# Altium PCB Pedal_XLR.PcbDoc (part 2 of 2)
Units mm, origin at the board's own origin, x right, y up, seen from the top; angles counter-clockwise.
Board outline 129.71 x 40 mm, 4 copper layers (Top Layer, Layer 1, Layer 2, Bottom Layer), stack 1.191 mm thick; 173 components, 126 nets, 550 pads, 107 vias.
Unrouted connection lines stored in the file: 71.
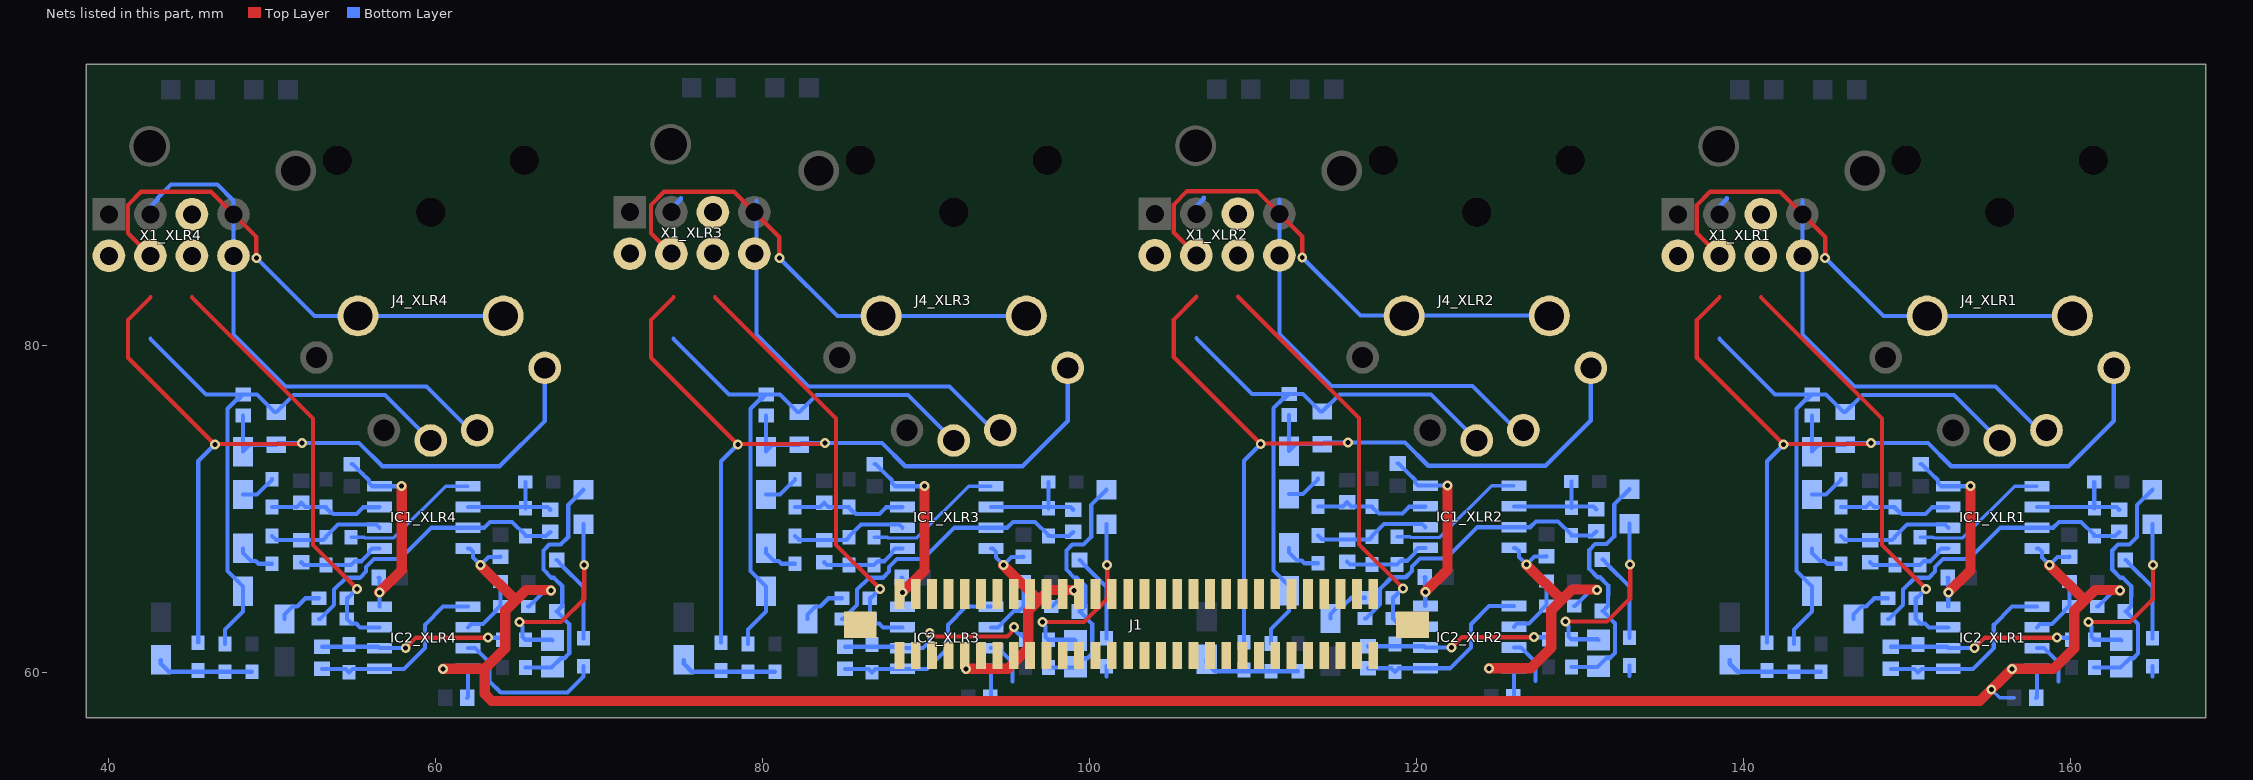
[diagram p2: the nets of this part, all layers, seen from the top]

## Via types
v1: diameter 0.61, hole 0.305, Top Layer to Bottom Layer, 107 vias

## Nets (pads, with @x,y where several pads share a name; then routed paths per layer and width w, separated by ;. In a path a pad name is that pad's centre, name@x,y a point inside that pad or via, vN(x,y) a via of type N, cw(c..) or ccw(c..) an arc to the next point about the centre after c; other vN are vias at no path point) (continued)
NetC1_XLR1_1: C1_XLR1.1 R2_XLR1.1 | length 2.2
  Bottom Layer w0.254: C1_XLR1.1@144.215,70.866 144.222,70.873 145.062,70.873 145.67,71.481 145.72,71.481 145.993,71.754 R2_XLR1.1@145.993,71.804
NetC1_XLR2_1: C1_XLR2.1 R2_XLR2.1 | length 2.2
  Bottom Layer w0.254: C1_XLR2.1@112.215,70.898 112.222,70.905 113.062,70.905 113.67,71.513 113.72,71.513 113.993,71.786 R2_XLR2.1@113.993,71.836
NetC1_XLR3_1: C1_XLR3.1 R2_XLR3.1 | length 2.2
  Bottom Layer w0.254: C1_XLR3.1@80.215,70.866 80.222,70.873 81.062,70.873 81.67,71.481 81.72,71.481 81.993,71.754 R2_XLR3.1@81.993,71.804
NetC1_XLR4_1: C1_XLR4.1 R2_XLR4.1 | length 2.2
  Bottom Layer w0.254: C1_XLR4.1@48.215,70.866 48.222,70.873 49.062,70.873 49.67,71.481 49.72,71.481 49.993,71.754 R2_XLR4.1@49.993,71.804
NetC3_XLR1_1: C3_XLR1.1 IC1_XLR1.7 R3_XLR1.1 R5_XLR1.2 | length 17.8
  Bottom Layer w0.254: R3_XLR1.1@148.865,63.246 148.915,63.246 149.785,64.116 149.785,65.053 150.5,65.768 151.356,65.768 151.737,66.149 151.737,66.423 152.223,66.909 153.819,66.909 155.744,68.834 158.974,68.834 159.326,69.186 160.677,69.186 161.487,68.376 R5_XLR1.2@161.487,68.326 162.757,68.326 C3_XLR1.1@163.011,68.58
NetC3_XLR1_2: C3_XLR1.2 IC1_XLR1.6 R5_XLR1.1 R9_XLR1.2 | length 6.7
  Bottom Layer w0.254: IC1_XLR1.6@157.976,70.104 R5_XLR1.1@161.487,70.104 ; R5_XLR1.1@161.487,70.026 R5_XLR1.1@161.487,70.104 ; R9_XLR1.2@161.487,71.628 R5_XLR1.1@161.487,70.104 ; C3_XLR1.2@163.011,69.93 162.837,70.104 R5_XLR1.1@161.487,70.104
NetC3_XLR2_1: C3_XLR2.1 IC1_XLR2.7 R3_XLR2.1 R5_XLR2.2 | length 17.8
  Bottom Layer w0.254: R3_XLR2.1@116.865,63.278 116.915,63.278 117.785,64.148 117.785,65.085 118.5,65.8 119.356,65.8 119.737,66.181 119.737,66.455 120.223,66.941 121.819,66.941 123.744,68.866 126.974,68.866 127.326,69.218 128.677,69.218 129.487,68.408 R5_XLR2.2@129.487,68.358 130.757,68.358 C3_XLR2.1@131.011,68.612
NetC3_XLR2_2: C3_XLR2.2 IC1_XLR2.6 R5_XLR2.1 R9_XLR2.2 | length 6.7
  Bottom Layer w0.254: IC1_XLR2.6@125.976,70.136 R5_XLR2.1@129.487,70.136 ; R5_XLR2.1@129.487,70.058 R5_XLR2.1@129.487,70.136 ; R9_XLR2.2@129.487,71.66 R5_XLR2.1@129.487,70.136 ; C3_XLR2.2@131.011,69.962 130.837,70.136 R5_XLR2.1@129.487,70.136
NetC3_XLR3_1: C3_XLR3.1 IC1_XLR3.7 R3_XLR3.1 R5_XLR3.2 | length 17.8
  Bottom Layer w0.254: R3_XLR3.1@84.865,63.246 84.915,63.246 85.785,64.116 85.785,65.053 86.5,65.768 87.356,65.768 87.737,66.149 87.737,66.423 88.223,66.909 89.819,66.909 91.744,68.834 94.974,68.834 95.326,69.186 96.677,69.186 97.487,68.376 R5_XLR3.2@97.487,68.326 98.757,68.326 C3_XLR3.1@99.011,68.58
NetC3_XLR3_2: C3_XLR3.2 IC1_XLR3.6 R5_XLR3.1 R9_XLR3.2 | length 6.7
  Bottom Layer w0.254: IC1_XLR3.6@93.976,70.104 R5_XLR3.1@97.487,70.104 ; R5_XLR3.1@97.487,70.026 R5_XLR3.1@97.487,70.104 ; R9_XLR3.2@97.487,71.628 R5_XLR3.1@97.487,70.104 ; C3_XLR3.2@99.011,69.93 98.837,70.104 R5_XLR3.1@97.487,70.104
NetC3_XLR4_1: C3_XLR4.1 IC1_XLR4.7 R3_XLR4.1 R5_XLR4.2 | length 17.8
  Bottom Layer w0.254: R3_XLR4.1@52.865,63.246 52.915,63.246 53.785,64.116 53.785,65.053 54.5,65.768 55.356,65.768 55.737,66.149 55.737,66.423 56.223,66.909 57.819,66.909 59.744,68.834 62.974,68.834 63.326,69.186 64.677,69.186 65.487,68.376 R5_XLR4.2@65.487,68.326 66.757,68.326 C3_XLR4.1@67.011,68.58
NetC3_XLR4_2: C3_XLR4.2 IC1_XLR4.6 R5_XLR4.1 R9_XLR4.2 | length 6.7
  Bottom Layer w0.254: IC1_XLR4.6@61.976,70.104 R5_XLR4.1@65.487,70.104 ; R5_XLR4.1@65.487,70.026 R5_XLR4.1@65.487,70.104 ; R9_XLR4.2@65.487,71.628 R5_XLR4.1@65.487,70.104 ; C3_XLR4.2@67.011,69.93 66.837,70.104 R5_XLR4.1@65.487,70.104
NetC4_XLR1_1: C4_XLR1.1 IC2_XLR1.1 IC2_XLR1.5 R6_XLR1.2 | length 11.5
  Bottom Layer w0.254: C4_XLR1.1@149.041,60.198 150.477,60.198 R6_XLR1.2@150.692,59.983 150.907,60.198 IC2_XLR1.1@152.552,60.198 154.056,60.198 155.337,61.479 155.337,62.893 156.452,64.008 IC2_XLR1.5@157.976,64.008
NetC4_XLR1_2: C4_XLR1.2 IC2_XLR1.2 R6_XLR1.1 R10_XLR1.2 | length 11.4
  Top Layer w0.254: v1(154.166,61.468) 154.801,62.103 v1(159.203,62.103)
  Bottom Layer w0.254: C4_XLR1.2@149.041,61.548 152.472,61.548 IC2_XLR1.2@152.552,61.468 v1(154.166,61.468) ; v1(159.203,62.103) 159.206,62.1 159.966,62.1 R10_XLR1.2@160.09,61.976
NetC4_XLR2_1: C4_XLR2.1 IC2_XLR2.1 IC2_XLR2.5 R6_XLR2.2 | length 11.5
  Bottom Layer w0.254: C4_XLR2.1@117.041,60.23 118.477,60.23 R6_XLR2.2@118.692,60.015 118.907,60.23 IC2_XLR2.1@120.552,60.23 122.056,60.23 123.337,61.511 123.337,62.925 124.452,64.04 IC2_XLR2.5@125.976,64.04
NetC4_XLR2_2: C4_XLR2.2 IC2_XLR2.2 R6_XLR2.1 R10_XLR2.2 | length 11.4
  Top Layer w0.254: v1(122.166,61.5) 122.801,62.135 v1(127.203,62.135)
  Bottom Layer w0.254: C4_XLR2.2@117.041,61.58 120.472,61.58 IC2_XLR2.2@120.552,61.5 v1(122.166,61.5) ; v1(127.203,62.135) 127.206,62.132 127.966,62.132 R10_XLR2.2@128.09,62.008
NetC4_XLR3_1: C4_XLR3.1 IC2_XLR3.1 IC2_XLR3.5 R6_XLR3.2 | length 11.5
  Bottom Layer w0.254: C4_XLR3.1@85.041,60.198 86.477,60.198 R6_XLR3.2@86.692,59.983 86.907,60.198 IC2_XLR3.1@88.552,60.198 90.056,60.198 91.337,61.479 91.337,62.893 92.452,64.008 IC2_XLR3.5@93.976,64.008
NetC4_XLR3_2: C4_XLR3.2 IC2_XLR3.2 R6_XLR3.1 R10_XLR3.2 | length 12.6
  Top Layer w0.254: v1(90.23,62.405) 90.326,62.405 90.554,62.176 90.807,62.176 94.972,62.176 95.23,62.434 95.23,62.509 95.375,62.654 v1(95.375,62.75)
  Bottom Layer w0.254: C4_XLR3.2@85.041,61.548 86.692,61.548 88.472,61.548 IC2_XLR3.2@88.552,61.468 89.823,61.468 90.23,61.874 v1(90.23,62.405) ; v1(95.375,62.75) 95.443,62.682 95.443,62.539 95.683,62.299 95.817,62.299 96.09,62.026 R10_XLR3.2@96.09,61.976
NetC4_XLR4_1: C4_XLR4.1 IC2_XLR4.1 IC2_XLR4.5 R6_XLR4.2 | length 11.5
  Bottom Layer w0.254: C4_XLR4.1@53.041,60.198 54.477,60.198 R6_XLR4.2@54.692,59.983 54.907,60.198 IC2_XLR4.1@56.552,60.198 58.056,60.198 59.337,61.479 59.337,62.893 60.452,64.008 IC2_XLR4.5@61.976,64.008
NetC4_XLR4_2: C4_XLR4.2 IC2_XLR4.2 R6_XLR4.1 R10_XLR4.2 | length 11.4
  Top Layer w0.254: v1(58.166,61.468) 58.801,62.103 v1(63.203,62.103)
  Bottom Layer w0.254: C4_XLR4.2@53.041,61.548 56.472,61.548 IC2_XLR4.2@56.552,61.468 v1(58.166,61.468) ; v1(63.203,62.103) 63.206,62.1 63.966,62.1 R10_XLR4.2@64.09,61.976
NetC5_XLR1_2: C5_XLR1.2 IC1_XLR1.3 R2_XLR1.2 R11_XLR1.2 | length 7.2
  Bottom Layer w0.254: R2_XLR1.2@145.993,70.104 147.517,70.104 C5_XLR1.2@147.771,70.358 148.025,70.104 R11_XLR1.2@149.295,70.104 149.295,70.054 149.568,69.781 149.618,69.781 149.727,69.672 151.148,69.672 151.557,70.081 152.529,70.081 IC1_XLR1.3@152.552,70.104
NetC5_XLR2_2: C5_XLR2.2 IC1_XLR2.3 R2_XLR2.2 R11_XLR2.2 | length 7.2
  Bottom Layer w0.254: R2_XLR2.2@113.993,70.136 115.517,70.136 C5_XLR2.2@115.771,70.39 116.025,70.136 R11_XLR2.2@117.295,70.136 117.295,70.086 117.568,69.813 117.618,69.813 117.727,69.704 119.148,69.704 119.557,70.113 120.529,70.113 IC1_XLR2.3@120.552,70.136
NetC5_XLR3_2: C5_XLR3.2 IC1_XLR3.3 R2_XLR3.2 R11_XLR3.2 | length 7.2
  Bottom Layer w0.254: R2_XLR3.2@81.993,70.104 83.517,70.104 C5_XLR3.2@83.771,70.358 84.025,70.104 R11_XLR3.2@85.295,70.104 85.295,70.054 85.568,69.781 85.618,69.781 85.727,69.672 87.148,69.672 87.557,70.081 88.529,70.081 IC1_XLR3.3@88.552,70.104
NetC5_XLR4_2: C5_XLR4.2 IC1_XLR4.3 R2_XLR4.2 R11_XLR4.2 | length 7.2
  Bottom Layer w0.254: R2_XLR4.2@49.993,70.104 51.517,70.104 C5_XLR4.2@51.771,70.358 52.025,70.104 R11_XLR4.2@53.295,70.104 53.295,70.054 53.568,69.781 53.618,69.781 53.727,69.672 55.148,69.672 55.557,70.081 56.529,70.081 IC1_XLR4.3@56.552,70.104
NetC6_XLR1_1: C6_XLR1.1 IC1_XLR1.1 R1_XLR1.1 R8_XLR1.1 | length 5.3
  Bottom Layer w0.254: C6_XLR1.1@147.771,66.722 147.945,66.548 R1_XLR1.1@150.819,66.548 151.055,66.784 151.451,66.784 151.916,67.249 151.916,67.366 152.114,67.564 IC1_XLR1.1@152.552,67.564
NetC6_XLR1_2: C6_XLR1.2 IC1_XLR1.2 R7_XLR1.2 R8_XLR1.2 | length 7.2
  Bottom Layer w0.254: R7_XLR1.2@145.993,68.326 146.247,68.072 149.119,68.072 R8_XLR1.2@149.295,68.248 149.295,68.298 150.025,69.028 152.358,69.028 IC1_XLR1.2@152.552,68.834
NetC6_XLR2_1: C6_XLR2.1 IC1_XLR2.1 R1_XLR2.1 R8_XLR2.1 | length 5.3
  Bottom Layer w0.254: C6_XLR2.1@115.771,66.754 115.945,66.58 R1_XLR2.1@118.819,66.58 119.055,66.816 119.451,66.816 119.916,67.281 119.916,67.398 120.114,67.596 IC1_XLR2.1@120.552,67.596
NetC6_XLR2_2: C6_XLR2.2 IC1_XLR2.2 R7_XLR2.2 R8_XLR2.2 | length 7.2
  Bottom Layer w0.254: R7_XLR2.2@113.993,68.358 114.247,68.104 117.119,68.104 R8_XLR2.2@117.295,68.28 117.295,68.33 118.025,69.06 120.358,69.06 IC1_XLR2.2@120.552,68.866
NetC6_XLR3_1: C6_XLR3.1 IC1_XLR3.1 R1_XLR3.1 R8_XLR3.1 | length 5.3
  Bottom Layer w0.254: C6_XLR3.1@83.771,66.722 83.945,66.548 R1_XLR3.1@86.819,66.548 87.055,66.784 87.451,66.784 87.916,67.249 87.916,67.366 88.114,67.564 IC1_XLR3.1@88.552,67.564
NetC6_XLR3_2: C6_XLR3.2 IC1_XLR3.2 R7_XLR3.2 R8_XLR3.2 | length 7.2
  Bottom Layer w0.254: R7_XLR3.2@81.993,68.326 82.247,68.072 85.119,68.072 R8_XLR3.2@85.295,68.248 85.295,68.298 86.025,69.028 88.358,69.028 IC1_XLR3.2@88.552,68.834
NetC6_XLR4_1: C6_XLR4.1 IC1_XLR4.1 R1_XLR4.1 R8_XLR4.1 | length 5.3
  Bottom Layer w0.254: C6_XLR4.1@51.771,66.722 51.945,66.548 R1_XLR4.1@54.819,66.548 55.055,66.784 55.451,66.784 55.916,67.249 55.916,67.366 56.114,67.564 IC1_XLR4.1@56.552,67.564
NetC6_XLR4_2: C6_XLR4.2 IC1_XLR4.2 R7_XLR4.2 R8_XLR4.2 | length 7.2
  Bottom Layer w0.254: R7_XLR4.2@49.993,68.326 50.247,68.072 53.119,68.072 R8_XLR4.2@53.295,68.248 53.295,68.298 54.025,69.028 56.358,69.028 IC1_XLR4.2@56.552,68.834
NetC7_XLR1_1: C7_XLR1.1 R7_XLR1.1 | length 2.3
  Bottom Layer w0.254: C7_XLR1.1@144.215,67.564 144.215,67.279 144.703,66.791 144.988,66.791 145.153,66.626 R7_XLR1.1@145.993,66.626
NetC7_XLR2_1: C7_XLR2.1 R7_XLR2.1 | length 2.3
  Bottom Layer w0.254: C7_XLR2.1@112.215,67.596 112.215,67.311 112.703,66.823 112.988,66.823 113.153,66.658 R7_XLR2.1@113.993,66.658
NetC7_XLR3_1: C7_XLR3.1 R7_XLR3.1 | length 2.3
  Bottom Layer w0.254: C7_XLR3.1@80.215,67.564 80.215,67.279 80.703,66.791 80.988,66.791 81.153,66.626 R7_XLR3.1@81.993,66.626
NetC7_XLR4_1: C7_XLR4.1 R7_XLR4.1 | length 2.3
  Bottom Layer w0.254: C7_XLR4.1@48.215,67.564 48.215,67.279 48.703,66.791 48.988,66.791 49.153,66.626 R7_XLR4.1@49.993,66.626
NetC12_XLR1_1: C12_XLR1.1 R14_XLR1.2 R15_XLR1.2 R16_XLR1.1 | length 6
  Bottom Layer w0.254: C12_XLR1.1@139.18,60.744 139.18,60.51 139.668,60.022 R15_XLR1.2@143.117,60.022 R16_XLR1.1@144.768,60.022
NetC12_XLR2_1: C12_XLR2.1 R14_XLR2.2 R15_XLR2.2 R16_XLR2.1 | length 6
  Bottom Layer w0.254: C12_XLR2.1@107.18,60.776 107.18,60.542 107.668,60.054 R15_XLR2.2@111.117,60.054 R16_XLR2.1@112.768,60.054
NetC12_XLR3_1: C12_XLR3.1 R14_XLR3.2 R15_XLR3.2 R16_XLR3.1 | length 6
  Bottom Layer w0.254: C12_XLR3.1@75.18,60.744 75.18,60.51 75.668,60.022 R15_XLR3.2@79.117,60.022 R16_XLR3.1@80.768,60.022
NetC12_XLR4_1: C12_XLR4.1 R14_XLR4.2 R15_XLR4.2 R16_XLR4.1 | length 6
  Bottom Layer w0.254: C12_XLR4.1@43.18,60.744 43.18,60.51 43.668,60.022 R15_XLR4.2@47.117,60.022 R16_XLR4.1@48.768,60.022
NetC13_XLR1_1: C13_XLR1.1 D2_XLR1.2 R20_XLR1.1 | length 12
  Top Layer w0.254: v1(161.128,63.056) 163.669,63.056 165.088,64.475 v1(165.088,66.548)
  Bottom Layer w0.254: v1(161.128,63.056) 161.128,62.96 161.306,62.781 161.306,62.157 R20_XLR1.1@161.487,61.976 163.087,61.976 C13_XLR1.1@163.138,61.925 ; D2_XLR1.2@165.043,69.054 165.043,66.593 v1(165.088,66.548)
NetC13_XLR1_2: C13_XLR1.2 D1_XLR1.2 D2_XLR1.1 R20_XLR1.2 | length 15.5
  Bottom Layer w0.254: R20_XLR1.2@161.487,60.276 163.089,60.276 163.661,60.848 163.878,60.848 164.168,61.138 164.168,62.952 D1_XLR1.2@163.417,63.703 ; D1_XLR1.2@163.392,63.703 D1_XLR1.2@163.417,63.703 ; D2_XLR1.1@165.043,71.154 164.109,70.22 164.109,68.261 163.648,67.8 162.947,67.8 162.587,67.44 162.587,66.266 163.085,65.768 163.245,65.768 163.743,65.271 163.743,64.65 163.74,64.647 163.74,64.026 D1_XLR1.2@163.417,63.703
NetC13_XLR2_1: C13_XLR2.1 D2_XLR2.2 R20_XLR2.1 | length 12
  Top Layer w0.254: v1(129.128,63.088) 131.669,63.088 133.088,64.507 v1(133.088,66.58)
  Bottom Layer w0.254: v1(129.128,63.088) 129.128,62.992 129.306,62.813 129.306,62.189 R20_XLR2.1@129.487,62.008 131.087,62.008 C13_XLR2.1@131.138,61.957 ; D2_XLR2.2@133.043,69.086 133.043,66.625 v1(133.088,66.58)
NetC13_XLR2_2: C13_XLR2.2 D1_XLR2.2 D2_XLR2.1 R20_XLR2.2 | length 15.5
  Bottom Layer w0.254: R20_XLR2.2@129.487,60.308 131.089,60.308 131.661,60.88 131.878,60.88 132.168,61.17 132.168,62.984 D1_XLR2.2@131.417,63.735 ; D1_XLR2.2@131.392,63.735 D1_XLR2.2@131.417,63.735 ; D2_XLR2.1@133.043,71.186 132.109,70.252 132.109,68.293 131.648,67.832 130.947,67.832 130.587,67.472 130.587,66.298 131.085,65.8 131.245,65.8 131.743,65.303 131.743,64.682 131.74,64.679 131.74,64.058 D1_XLR2.2@131.417,63.735
NetC13_XLR3_1: C13_XLR3.1 D2_XLR3.2 R20_XLR3.1 | length 12
  Top Layer w0.254: v1(97.128,63.056) 99.669,63.056 101.088,64.475 v1(101.088,66.548)
  Bottom Layer w0.254: v1(97.128,63.056) 97.128,62.96 97.306,62.781 97.306,62.157 R20_XLR3.1@97.487,61.976 99.087,61.976 C13_XLR3.1@99.138,61.925 ; D2_XLR3.2@101.043,69.054 101.043,66.593 v1(101.088,66.548)
NetC13_XLR3_2: C13_XLR3.2 D1_XLR3.2 D2_XLR3.1 R20_XLR3.2 | length 15.5
  Bottom Layer w0.254: R20_XLR3.2@97.487,60.276 99.089,60.276 99.661,60.848 99.878,60.848 100.168,61.138 100.168,62.952 D1_XLR3.2@99.417,63.703 ; D1_XLR3.2@99.392,63.703 D1_XLR3.2@99.417,63.703 ; D2_XLR3.1@101.043,71.154 100.109,70.22 100.109,68.261 99.648,67.8 98.947,67.8 98.587,67.44 98.587,66.266 99.085,65.768 99.245,65.768 99.743,65.271 99.743,64.65 99.74,64.647 99.74,64.026 D1_XLR3.2@99.417,63.703
NetC13_XLR4_1: C13_XLR4.1 D2_XLR4.2 R20_XLR4.1 | length 12
  Top Layer w0.254: v1(65.128,63.056) 67.669,63.056 69.088,64.475 v1(69.088,66.548)
  Bottom Layer w0.254: v1(65.128,63.056) 65.128,62.96 65.306,62.781 65.306,62.157 R20_XLR4.1@65.487,61.976 67.087,61.976 C13_XLR4.1@67.138,61.925 ; D2_XLR4.2@69.043,69.054 69.043,66.593 v1(69.088,66.548)
NetC13_XLR4_2: C13_XLR4.2 D1_XLR4.2 D2_XLR4.1 R20_XLR4.2 | length 15.5
  Bottom Layer w0.254: R20_XLR4.2@65.487,60.276 67.089,60.276 67.661,60.848 67.878,60.848 68.168,61.138 68.168,62.952 D1_XLR4.2@67.417,63.703 ; D1_XLR4.2@67.392,63.703 D1_XLR4.2@67.417,63.703 ; D2_XLR4.1@69.043,71.154 68.109,70.22 68.109,68.261 67.648,67.8 66.947,67.8 66.587,67.44 66.587,66.266 67.085,65.768 67.245,65.768 67.743,65.271 67.743,64.65 67.74,64.647 67.74,64.026 D1_XLR4.2@67.417,63.703
NetC14_XLR1_1: C14_XLR1.1 R13_XLR1.1 | length 2.8
  Bottom Layer w0.254: C14_XLR1.1@146.755,63.246 146.755,63.531 147.243,64.019 147.528,64.019 148.025,64.516 R13_XLR1.1@148.865,64.516
NetC14_XLR2_1: C14_XLR2.1 R13_XLR2.1 | length 2.8
  Bottom Layer w0.254: C14_XLR2.1@114.755,63.278 114.755,63.563 115.243,64.051 115.528,64.051 116.025,64.548 R13_XLR2.1@116.865,64.548
NetC14_XLR3_1: C14_XLR3.1 R13_XLR3.1 | length 2.8
  Bottom Layer w0.254: C14_XLR3.1@82.755,63.246 82.755,63.531 83.243,64.019 83.528,64.019 84.025,64.516 R13_XLR3.1@84.865,64.516
NetC14_XLR4_1: C14_XLR4.1 R13_XLR4.1 | length 2.8
  Bottom Layer w0.254: C14_XLR4.1@50.755,63.246 50.755,63.531 51.243,64.019 51.528,64.019 52.025,64.516 R13_XLR4.1@52.865,64.516
NetD1_XLR1_1: D1_XLR1.1 R18_XLR1.2 | length 5.5
  Bottom Layer w0.254: D1_XLR1.1@163.392,66.853 163.417,66.853 163.74,66.53 163.74,66.505 165.043,65.202 R18_XLR1.2@165.043,62.064
NetD1_XLR2_1: D1_XLR2.1 R18_XLR2.2 | length 5.5
  Bottom Layer w0.254: D1_XLR2.1@131.392,66.885 131.417,66.885 131.74,66.562 131.74,66.537 133.043,65.234 R18_XLR2.2@133.043,62.096
NetD1_XLR3_1: D1_XLR3.1 R18_XLR3.2 | length 5.5
  Bottom Layer w0.254: D1_XLR3.1@99.392,66.853 99.417,66.853 99.74,66.53 99.74,66.505 101.043,65.202 R18_XLR3.2@101.043,62.064
NetD1_XLR4_1: D1_XLR4.1 R18_XLR4.2 | length 5.5
  Bottom Layer w0.254: D1_XLR4.1@67.392,66.853 67.417,66.853 67.74,66.53 67.74,66.505 69.043,65.202 R18_XLR4.2@69.043,62.064
NetIC1_XLR1_5: IC1_XLR1.5 R1_XLR1.2 | length 8.5
  Bottom Layer w0.203: R1_XLR1.2@150.819,68.248 151.619,68.248 151.663,68.204 153.441,68.204 156.611,71.374 IC1_XLR1.5@157.976,71.374
NetIC1_XLR2_5: IC1_XLR2.5 R1_XLR2.2 | length 8.5
  Bottom Layer w0.203: R1_XLR2.2@118.819,68.28 119.619,68.28 119.663,68.236 121.441,68.236 124.611,71.406 IC1_XLR2.5@125.976,71.406
NetIC1_XLR3_5: IC1_XLR3.5 R1_XLR3.2 | length 8.5
  Bottom Layer w0.203: R1_XLR3.2@86.819,68.248 87.619,68.248 87.663,68.204 89.441,68.204 92.611,71.374 IC1_XLR3.5@93.976,71.374
NetIC1_XLR4_5: IC1_XLR4.5 R1_XLR4.2 | length 8.5
  Bottom Layer w0.203: R1_XLR4.2@54.819,68.248 55.619,68.248 55.663,68.204 57.441,68.204 60.611,71.374 IC1_XLR4.5@61.976,71.374
NetIC2_XLR1_6: IC2_XLR1.6 R17_XLR1.2 R19_XLR1.1 | length 4.1
  Bottom Layer w0.254: IC2_XLR1.6@157.976,62.738 158.174,62.936 158.891,62.936 159.64,63.685 159.64,63.735 159.913,64.008 R17_XLR1.2@159.963,64.008 R19_XLR1.1@159.963,65.532
NetIC2_XLR1_7: IC2_XLR1.7 R18_XLR1.1 | length 3.5
  Bottom Layer w0.254: IC2_XLR1.7@157.976,61.468 158.413,61.468 159.295,60.587 159.295,59.433 ; 165.043,59.736 R18_XLR1.1@165.043,60.364
NetIC2_XLR2_6: IC2_XLR2.6 R17_XLR2.2 R19_XLR2.1 | length 4.1
  Bottom Layer w0.254: IC2_XLR2.6@125.976,62.77 126.174,62.968 126.891,62.968 127.64,63.717 127.64,63.767 127.913,64.04 R17_XLR2.2@127.963,64.04 R19_XLR2.1@127.963,65.564
NetIC2_XLR2_7: IC2_XLR2.7 R18_XLR2.1 | length 3.5
  Bottom Layer w0.254: IC2_XLR2.7@125.976,61.5 126.413,61.5 127.295,60.619 127.295,59.465 ; 133.043,59.768 R18_XLR2.1@133.043,60.396
NetIC2_XLR3_6: IC2_XLR3.6 R17_XLR3.2 R19_XLR3.1 | length 4
  Bottom Layer w0.254: IC2_XLR3.6@93.976,62.738 94.413,62.738 94.689,63.014 94.689,63.034 95.39,63.735 95.69,63.735 R17_XLR3.2@95.963,64.008 R19_XLR3.1@95.963,65.532
NetIC2_XLR3_7: IC2_XLR3.7 R18_XLR3.1 | length 3.5
  Bottom Layer w0.254: IC2_XLR3.7@93.976,61.468 94.413,61.468 95.295,60.587 95.295,59.433 ; 101.043,59.736 R18_XLR3.1@101.043,60.364
NetIC2_XLR4_6: IC2_XLR4.6 R17_XLR4.2 R19_XLR4.1 | length 4.1
  Bottom Layer w0.254: IC2_XLR4.6@61.976,62.738 62.174,62.936 62.891,62.936 63.64,63.685 63.64,63.735 63.913,64.008 R17_XLR4.2@63.963,64.008 R19_XLR4.1@63.963,65.532
NetIC2_XLR4_7: IC2_XLR4.7 R18_XLR4.1 | length 9.9
  Bottom Layer w0.254: IC2_XLR4.7@61.976,61.468 62.413,61.468 63.295,60.587 63.295,59.433 63.978,58.75 68.057,58.75 69.043,59.736 R18_XLR4.1@69.043,60.364
NetJ1_1: J1.1 J1.2
NetJ1_3: J1.3 J1.4
NetJ1_5: J1.5 J1.6
NetJ1_7: J1.7 J1.8
NetJ1_9: J1.9 J1.10
NetJ1_11: J1.11 J1.12
NetJ1_13: J1.13 J1.14
NetJ1_15: J1.15 J1.16
NetJ1_17: J1.17 J1.18
NetJ1_19: J1.19 J1.20
NetJ1_21: J1.21 J1.22
NetJ1_23: J1.23 J1.24
NetJ1_25: J1.25 J1.26
NetJ1_27: J1.27 J1.28
NetJ1_29: J1.29 J1.30
NetJ1_31: J1.31 J1.32
NetJ1_33: J1.33 J1.34
NetJ1_35: J1.35 J1.36
NetJ1_37: J1.37 J1.38
NetJ1_39: J1.39 J1.40
NetJ1_41: J1.41 J1.42
NetJ1_43: J1.43 J1.44
NetJ1_45: J1.45 J1.46
NetJ1_47: J1.47 J1.48
NetJ1_49: J1.49 J1.50
NetJ1_51: J1.51 J1.52
NetJ1_53: J1.53 J1.54
NetJ1_55: J1.55 J1.56
NetJ1_57: J1.57 J1.58
NetJ1_59: J1.59 J1.60
PAD_SW_XLR1: IC2_XLR1.3 R3_XLR1.2 R13_XLR1.2 X1_XLR1.5 | length 26.3
  Top Layer w0.254: 141.085,82.931 148.502,75.514 148.502,67.779 151.18,65.101 v1(151.18,65.082)
  Bottom Layer w0.254: v1@151.108,65.014 150.888,64.794 150.888,64.789 150.615,64.516 R13_XLR1.2@150.565,64.516 R3_XLR1.2@150.565,63.246 150.838,62.973 151.137,62.973 151.372,62.738 IC2_XLR1.3@152.552,62.738
PAD_SW_XLR2: IC2_XLR2.3 R3_XLR2.2 R13_XLR2.2 X1_XLR2.5 | length 26.3
  Top Layer w0.254: 109.085,82.963 116.502,75.546 116.502,67.811 119.18,65.133 v1(119.18,65.114)
  Bottom Layer w0.254: v1@119.108,65.046 118.888,64.826 118.888,64.821 118.615,64.548 R13_XLR2.2@118.565,64.548 R3_XLR2.2@118.565,63.278 118.838,63.005 119.137,63.005 119.372,62.77 IC2_XLR2.3@120.552,62.77
PAD_SW_XLR3: IC2_XLR3.3 R3_XLR3.2 R13_XLR3.2 X1_XLR3.5 | length 26.3
  Top Layer w0.254: 77.085,82.931 84.502,75.514 84.502,67.779 87.18,65.101 v1(87.18,65.082)
  Bottom Layer w0.254: v1@87.108,65.014 86.888,64.794 86.888,64.789 86.615,64.516 R13_XLR3.2@86.565,64.516 R3_XLR3.2@86.565,63.246 86.838,62.973 87.137,62.973 87.372,62.738 IC2_XLR3.3@88.552,62.738
PAD_SW_XLR4: IC2_XLR4.3 R3_XLR4.2 R13_XLR4.2 X1_XLR4.5 | length 26.3
  Top Layer w0.254: 45.085,82.931 52.502,75.514 52.502,67.779 55.18,65.101 v1(55.18,65.082)
  Bottom Layer w0.254: v1@55.108,65.014 54.888,64.794 54.888,64.789 54.615,64.516 R13_XLR4.2@54.565,64.516 R3_XLR4.2@54.565,63.246 54.838,62.973 55.137,62.973 55.372,62.738 IC2_XLR4.3@56.552,62.738
TRS_RING_XLR1: J4_XLR1.5 X1_XLR1.2 | length 26.7
  Bottom Layer w0.254: 138.545,88.011 138.545,88.483 138.993,88.931 138.993,89.008 ; 143.625,88.837 143.625,80.645 146.8,77.47 155.436,77.47 158.103,74.803 J4_XLR1.5@158.548,74.803
TRS_RING_XLR2: J4_XLR2.5 X1_XLR2.2 | length 26.7
  Bottom Layer w0.254: 106.545,88.043 106.545,88.515 106.993,88.963 106.993,89.04 ; 111.625,88.869 111.625,80.677 114.8,77.502 123.436,77.502 126.103,74.835 J4_XLR2.5@126.548,74.835
TRS_RING_XLR3: J4_XLR3.5 X1_XLR3.2 | length 26.7
  Bottom Layer w0.254: 74.545,88.011 74.545,88.483 74.993,88.931 74.993,89.008 ; 79.625,88.837 79.625,80.645 82.8,77.47 91.436,77.47 94.103,74.803 J4_XLR3.5@94.548,74.803
TRS_RING_XLR4: J4_XLR4.5 X1_XLR4.2 | length 32.1
  Bottom Layer w0.254: 42.545,88.011 42.545,88.483 42.993,88.931 42.993,89.008 43.811,89.826 46.636,89.826 47.625,88.837 47.625,80.645 50.8,77.47 59.436,77.47 62.103,74.803 J4_XLR4.5@62.548,74.803
TRS_TIP_XLR1: J4_XLR1.6 J4_XLR1.7 X1_XLR1.4 | length 30.9
  Top Layer w0.254: X1_XLR1.4@138.545,85.471 137.164,86.852 137.164,88.583 137.973,89.392 142.243,89.392 145.022,86.613 v1(145.022,85.344)
  Bottom Layer w0.254: v1(145.022,85.344) 148.578,81.788 151.245,81.788 J4_XLR1.7@160.135,81.788
TRS_TIP_XLR2: J4_XLR2.6 J4_XLR2.7 X1_XLR2.4 | length 30.9
  Top Layer w0.254: X1_XLR2.4@106.545,85.503 105.164,86.884 105.164,88.615 105.973,89.424 110.243,89.424 113.022,86.645 v1(113.022,85.376)
  Bottom Layer w0.254: v1(113.022,85.376) 116.578,81.82 119.245,81.82 J4_XLR2.7@128.135,81.82
TRS_TIP_XLR3: J4_XLR3.6 J4_XLR3.7 X1_XLR3.4 | length 30.9
  Top Layer w0.254: X1_XLR3.4@74.545,85.471 73.164,86.852 73.164,88.583 73.973,89.392 78.243,89.392 81.022,86.613 v1(81.022,85.344)
  Bottom Layer w0.254: v1(81.022,85.344) 84.578,81.788 87.245,81.788 J4_XLR3.7@96.135,81.788
TRS_TIP_XLR4: J4_XLR4.6 J4_XLR4.7 X1_XLR4.4 | length 30.9
  Top Layer w0.254: X1_XLR4.4@42.545,85.471 41.164,86.852 41.164,88.583 41.973,89.392 46.243,89.392 49.022,86.613 v1(49.022,85.344)
  Bottom Layer w0.254: v1(49.022,85.344) 52.578,81.788 J4_XLR4.6@55.245,81.788 J4_XLR4.7@64.135,81.788
VCC+: C8_XLR1.1 C8_XLR2.1 C8_XLR3.1 C8_XLR4.1 C9_XLR1.1 C9_XLR2.1 C9_XLR3.1 C9_XLR4.1 IC1_XLR1.8 IC1_XLR2.8 IC1_XLR3.8 IC1_XLR4.8 IC2_XLR1.8 IC2_XLR2.8 IC2_XLR3.8 IC2_XLR4.8 R17_XLR1.1 R17_XLR2.1 R17_XLR3.1 R17_XLR4.1 | length 181.5
  Top Layer w0.635: v1(60.452,60.198) 62.992,60.198 ; v1(62.738,66.548) 62.738,66.537 64.892,64.384 ; v1(67.057,64.986) 67.02,65.024 65.532,65.024 64.892,64.384 ; v1(92.452,60.198) 94.992,60.198 96.262,61.468 96.262,62.6 96.251,62.611 96.251,63.743 96.892,64.384 ; v1(94.738,66.548) 94.738,66.537 96.892,64.384 ; v1(99.057,64.986) 99.02,65.024 97.532,65.024 96.892,64.384 ; v1(124.452,60.23) 126.992,60.23 128.262,61.5 128.262,62.632 128.251,62.643 128.251,63.775 128.892,64.416 ; v1(126.738,66.58) 126.738,66.569 128.892,64.416 ; v1(131.057,65.018) 131.02,65.056 129.532,65.056 128.892,64.416 ; v1(158.738,66.548) 158.738,66.537 160.892,64.384 ; v1(163.057,64.986) 163.02,65.024 161.532,65.024 160.892,64.384 ; 62.992,60.198 64.262,61.468 64.262,62.6 64.251,62.611 64.251,63.743 64.892,64.384 ; 62.992,60.198 62.992,58.674 63.436,58.23 154.484,58.23 v1(156.452,60.198) 158.992,60.198 160.262,61.468 160.262,62.6 160.251,62.611 160.251,63.743 160.892,64.384
  Bottom Layer w0.203: v1(155.182,58.928) 155.69,58.42 156.581,58.42
  Bottom Layer w0.254: v1(60.452,60.198) IC2_XLR4.8@61.976,60.198 61.976,58.465 C9_XLR4.1@61.931,58.42 ; IC1_XLR4.8@61.976,67.564 62.081,67.564 62.279,67.366 62.279,67.007 v1(62.738,66.548) 63.231,67.041 63.948,67.041 C8_XLR4.1@63.963,67.056 ; R17_XLR4.1@65.663,64.008 65.713,64.008 66.623,64.918 66.989,64.918 v1(67.057,64.986) ; v1(92.452,60.198) IC2_XLR3.8@93.976,60.198 93.976,58.465 C9_XLR3.1@93.931,58.42 ; IC1_XLR3.8@93.976,67.564 94.081,67.564 94.279,67.366 94.279,67.007 v1(94.738,66.548) 95.231,67.041 95.948,67.041 C8_XLR3.1@95.963,67.056 ; R17_XLR3.1@97.663,64.008 97.713,64.008 98.623,64.918 98.989,64.918 v1(99.057,64.986) ; v1(124.452,60.23) IC2_XLR2.8@125.976,60.23 125.976,58.497 C9_XLR2.1@125.931,58.452 ; IC1_XLR2.8@125.976,67.596 126.081,67.596 126.279,67.398 126.279,67.039 v1(126.738,66.58) 127.231,67.073 127.948,67.073 C8_XLR2.1@127.963,67.088 ; R17_XLR2.1@129.663,64.04 129.713,64.04 130.623,64.95 130.989,64.95 v1(131.057,65.018) ; v1(156.452,60.198) IC2_XLR1.8@157.976,60.198 157.976,58.465 C9_XLR1.1@157.931,58.42 ; IC1_XLR1.8@157.976,67.564 158.081,67.564 158.279,67.366 158.279,67.007 v1(158.738,66.548) 159.231,67.041 159.948,67.041 C8_XLR1.1@159.963,67.056 ; R17_XLR1.1@161.663,64.008 161.713,64.008 162.623,64.918 162.989,64.918 v1(163.057,64.986)
VCC-: C10_XLR1.2 C10_XLR2.2 C10_XLR3.2 C10_XLR4.2 C11_XLR1.2 C11_XLR2.2 C11_XLR3.2 C11_XLR4.2 IC1_XLR1.4 IC1_XLR2.4 IC1_XLR3.4 IC1_XLR4.4 IC2_XLR1.4 IC2_XLR2.4 IC2_XLR3.4 IC2_XLR4.4 | length 50.2
  Top Layer w0.635: v1(56.552,64.879) 57.912,66.24 v1(57.912,71.374) ; v1(88.552,64.879) 89.912,66.24 v1(89.912,71.374) ; v1(120.552,64.912) 121.912,66.272 v1(121.912,71.406) ; v1(152.552,64.88) 153.912,66.24 v1(153.912,71.374)
  Bottom Layer w0.254: C10_XLR4.2@54.864,72.724 54.914,72.724 55.484,72.154 55.501,72.154 55.916,71.738 55.916,71.572 56.114,71.374 IC1_XLR4.4@56.552,71.374 v1(57.912,71.374) ; C11_XLR4.2@56.517,65.786 56.552,65.751 v1(56.552,64.879) IC2_XLR4.4@56.552,64.008 ; C10_XLR3.2@86.864,72.724 86.914,72.724 87.484,72.154 87.501,72.154 87.916,71.738 87.916,71.572 88.114,71.374 IC1_XLR3.4@88.552,71.374 v1(89.912,71.374) ; C11_XLR3.2@88.517,65.786 88.552,65.751 v1(88.552,64.879) IC2_XLR3.4@88.552,64.008 ; C10_XLR2.2@118.864,72.756 118.914,72.756 119.484,72.186 119.501,72.186 119.916,71.77 119.916,71.604 120.114,71.406 IC1_XLR2.4@120.552,71.406 v1(121.912,71.406) ; C11_XLR2.2@120.517,65.818 120.552,65.783 v1(120.552,64.912) IC2_XLR2.4@120.552,64.04 ; C10_XLR1.2@150.864,72.724 150.914,72.724 151.484,72.154 151.501,72.154 151.916,71.738 151.916,71.572 152.114,71.374 IC1_XLR1.4@152.552,71.374 v1(153.912,71.374) ; C11_XLR1.2@152.517,65.786 152.552,65.751 v1(152.552,64.88) IC2_XLR1.4@152.552,64.008
XLR_A_XLR1: C1_XLR1.2 C2_XLR1.2 J4_XLR1.2 R4_XLR1.1 R14_XLR1.1 X1_XLR1.6 | length 55.6
  Top Layer w0.254: 138.545,82.931 137.164,81.55 137.164,79.232 v1(142.482,73.914) 142.523,73.955 147.751,73.955 v1(147.816,74.02)
  Bottom Layer w0.254: R14_XLR1.1@141.466,61.8 141.466,72.898 v1(142.482,73.914) ; R4_XLR1.1@144.215,75.692 C1_XLR1.2@144.215,73.486 144.643,73.914 C2_XLR1.2@146.247,73.914 146.353,74.02 v1(147.816,74.02) 151.304,74.02 152.732,72.592 159.914,72.592 162.675,75.354 J4_XLR1.2@162.675,78.613
XLR_A_XLR2: C1_XLR2.2 C2_XLR2.2 J4_XLR2.2 R4_XLR2.1 R14_XLR2.1 X1_XLR2.6 | length 55.6
  Top Layer w0.254: 106.545,82.963 105.164,81.582 105.164,79.264 v1(110.482,73.946) 110.523,73.987 115.751,73.987 v1(115.816,74.052)
  Bottom Layer w0.254: R14_XLR2.1@109.466,61.832 109.466,72.93 v1(110.482,73.946) ; R4_XLR2.1@112.215,75.724 C1_XLR2.2@112.215,73.518 112.643,73.946 C2_XLR2.2@114.247,73.946 114.353,74.052 v1(115.816,74.052) 119.304,74.052 120.732,72.624 127.914,72.624 130.675,75.386 J4_XLR2.2@130.675,78.645
XLR_A_XLR3: C1_XLR3.2 C2_XLR3.2 J4_XLR3.2 R4_XLR3.1 R14_XLR3.1 X1_XLR3.6 | length 55.6
  Top Layer w0.254: 74.545,82.931 73.164,81.55 73.164,79.232 v1(78.482,73.914) 78.523,73.955 83.751,73.955 v1(83.816,74.02)
  Bottom Layer w0.254: R14_XLR3.1@77.466,61.8 77.466,72.898 v1(78.482,73.914) ; R4_XLR3.1@80.215,75.692 C1_XLR3.2@80.215,73.486 80.643,73.914 C2_XLR3.2@82.247,73.914 82.353,74.02 v1(83.816,74.02) 87.304,74.02 88.732,72.592 95.914,72.592 98.675,75.354 J4_XLR3.2@98.675,78.613
XLR_A_XLR4: C1_XLR4.2 C2_XLR4.2 J4_XLR4.2 R4_XLR4.1 R14_XLR4.1 X1_XLR4.6 | length 55.6
  Top Layer w0.254: 42.545,82.931 41.164,81.55 41.164,79.232 v1(46.482,73.914) 46.523,73.955 51.751,73.955 v1(51.816,74.02)
  Bottom Layer w0.254: R14_XLR4.1@45.466,61.8 45.466,72.898 v1(46.482,73.914) ; R4_XLR4.1@48.215,75.692 C1_XLR4.2@48.215,73.486 48.643,73.914 C2_XLR4.2@50.247,73.914 50.353,74.02 v1(51.816,74.02) 55.304,74.02 56.732,72.592 63.914,72.592 66.675,75.354 J4_XLR4.2@66.675,78.613
XLR_B_XLR1: C2_XLR1.1 C7_XLR1.2 J4_XLR1.3 R4_XLR1.2 R15_XLR1.1 X1_XLR1.8 | length 37.1
  Bottom Layer w0.254: 138.545,80.391 141.944,76.992 R4_XLR1.2@144.215,76.992 ; R15_XLR1.1@143.117,61.722 143.117,62.611 144.215,63.709 C7_XLR1.2@144.215,64.944 144.215,65.229 143.27,66.174 143.27,76.114 143.85,76.694 143.917,76.694 R4_XLR1.2@144.215,76.992 ; J4_XLR1.3@155.69,74.168 152.896,76.962 147.295,76.962 C2_XLR1.1@146.247,75.914 146.147,75.914 145.069,76.992 R4_XLR1.2@144.215,76.992
XLR_B_XLR2: C2_XLR2.1 C7_XLR2.2 J4_XLR2.3 R4_XLR2.2 R15_XLR2.1 X1_XLR2.8 | length 37.1
  Bottom Layer w0.254: 106.545,80.423 109.944,77.024 R4_XLR2.2@112.215,77.024 ; R15_XLR2.1@111.117,61.754 111.117,62.643 112.215,63.741 C7_XLR2.2@112.215,64.976 112.215,65.261 111.27,66.206 111.27,76.146 111.85,76.726 111.917,76.726 R4_XLR2.2@112.215,77.024 ; J4_XLR2.3@123.69,74.2 120.896,76.994 115.295,76.994 C2_XLR2.1@114.247,75.946 114.147,75.946 113.069,77.024 R4_XLR2.2@112.215,77.024
XLR_B_XLR3: C2_XLR3.1 C7_XLR3.2 J4_XLR3.3 R4_XLR3.2 R15_XLR3.1 X1_XLR3.8 | length 37.1
  Bottom Layer w0.254: 74.545,80.391 77.944,76.992 R4_XLR3.2@80.215,76.992 ; R15_XLR3.1@79.117,61.722 79.117,62.611 80.215,63.709 C7_XLR3.2@80.215,64.944 80.215,65.229 79.27,66.174 79.27,76.114 79.85,76.694 79.917,76.694 R4_XLR3.2@80.215,76.992 ; J4_XLR3.3@91.69,74.168 88.896,76.962 83.295,76.962 C2_XLR3.1@82.247,75.914 82.147,75.914 81.069,76.992 R4_XLR3.2@80.215,76.992
XLR_B_XLR4: C2_XLR4.1 C7_XLR4.2 J4_XLR4.3 R4_XLR4.2 R15_XLR4.1 X1_XLR4.8 | length 37.1
  Bottom Layer w0.254: 42.545,80.391 45.944,76.992 R4_XLR4.2@48.215,76.992 ; R15_XLR4.1@47.117,61.722 47.117,62.611 48.215,63.709 C7_XLR4.2@48.215,64.944 48.215,65.229 47.27,66.174 47.27,76.114 47.85,76.694 47.917,76.694 R4_XLR4.2@48.215,76.992 ; J4_XLR4.3@59.69,74.168 56.896,76.962 51.295,76.962 C2_XLR4.1@50.247,75.914 50.147,75.914 49.069,76.992 R4_XLR4.2@48.215,76.992
pads on no net: J4_XLR1. J4_XLR1.8 J4_XLR2. J4_XLR2.8 J4_XLR3. J4_XLR3.8 J4_XLR4. J4_XLR4.8 J?_XLR1. J?_XLR1.1 J?_XLR1.2 J?_XLR1.3 J?_XLR1.G J?_XLR1.GS J?_XLR1.R J?_XLR1.RS J?_XLR1.S J?_XLR1.SS J?_XLR1.TS J?_XLR1.Y J?_XLR2. J?_XLR2.1 J?_XLR2.2 J?_XLR2.3 J?_XLR2.G J?_XLR2.GS J?_XLR2.R J?_XLR2.RS J?_XLR2.S J?_XLR2.SS J?_XLR2.TS J?_XLR2.Y J?_XLR3. J?_XLR3.1 J?_XLR3.2 J?_XLR3.3 J?_XLR3.G J?_XLR3.GS J?_XLR3.R J?_XLR3.RS J?_XLR3.S J?_XLR3.SS J?_XLR3.TS J?_XLR3.Y J?_XLR4. J?_XLR4.1 J?_XLR4.2 J?_XLR4.3 J?_XLR4.G J?_XLR4.GS J?_XLR4.R J?_XLR4.RS J?_XLR4.S J?_XLR4.SS J?_XLR4.TS J?_XLR4.Y
copper on no net: | length 7
  Top Layer w0.203: 59.69,87.263 59.69,89.013 ; 91.694,87.263 91.694,89.013 ; 123.698,87.263 123.698,89.013 ; 155.702,87.263 155.702,89.013

## Polygon pours and split planes (outlines as drawn)
GND_A on Top Layer "NONET_L02_P-001" (solid, remove dead copper, pour order 0): 38.689,97.282 38.608,97.201 38.608,57.15 168.402,57.15 168.402,97.282
GND_A on Bottom Layer "NONET_L02_P-001" (solid, remove dead copper, pour order 1): 38.608,97.282 38.608,57.15 168.402,57.15 168.402,97.282

## Silkscreen, mask and mechanical layers (free items; w line width, h text height)
Top Overlay:
  circle w0.381: c138.498,92.168 r2.236
  circle w0.381: c106.621,92.295 r2.236
  circle w0.381: c74.498,92.2 r2.236
  circle w0.381: c42.498,92.168 r2.236
Bottom Overlay:
  lines w0.127: 40.262,92.168 40.896,90.563 42.415,89.934 44.071,90.563 44.706,92.087 44.119,93.708 42.547,94.5 40.878,93.708 40.262,92.168 ; 72.262,92.2 72.896,90.595 74.415,89.966 76.071,90.595 76.706,92.119 76.119,93.74 74.547,94.532 72.878,93.74 72.262,92.2 ; 104.385,92.295 105.019,90.69 106.538,90.061 108.194,90.69 108.829,92.214 108.242,93.835 106.67,94.627 105.001,93.835 104.385,92.295 ; 136.262,92.168 136.896,90.563 138.415,89.934 140.071,90.563 140.706,92.087 140.119,93.708 138.547,94.5 136.878,93.708 136.262,92.168
Board:
  lines w0.127: 168.315,57.201 168.315,51.562 38.608,51.562 38.608,57.201 ; 38.608,57.201 38.608,57.201
  lines w0.203: 38.608,57.201 53.315,57.201 168.315,57.201 168.315,97.201 53.315,97.201 38.608,97.201
  lines w0.254: 38.608,57.201 38.608,97.201
Mechanical 15:
  lines w0.254: 35.565,91.176 35.565,100.526 49.065,100.526 49.09,100.501 49.09,91.251 35.64,91.251 35.565,91.176 ; 67.565,91.151 67.64,91.226 81.09,91.226 81.09,100.476 81.065,100.501 67.565,100.501 67.565,91.151 ; 99.565,91.126 99.64,91.201 113.09,91.201 113.09,100.451 113.065,100.476 99.565,100.476 99.565,91.126 ; 131.59,91.126 131.665,91.201 145.115,91.201 145.115,100.451 145.09,100.476 131.59,100.476 131.59,91.126